# Altium PCB driver_sapog_compact.PcbDoc (part 1 of 2)
Units mil, origin at the board's own origin, x right, y up, seen from the top; angles counter-clockwise.
Board outline 2630 x 2261.5 mil, 4 copper layers (Top Layer, Mid-Layer 1, Mid-Layer 2, Bottom Layer); 113 components, 104 nets, 394 pads, 280 vias.
Unrouted connection lines stored in the file: 128.
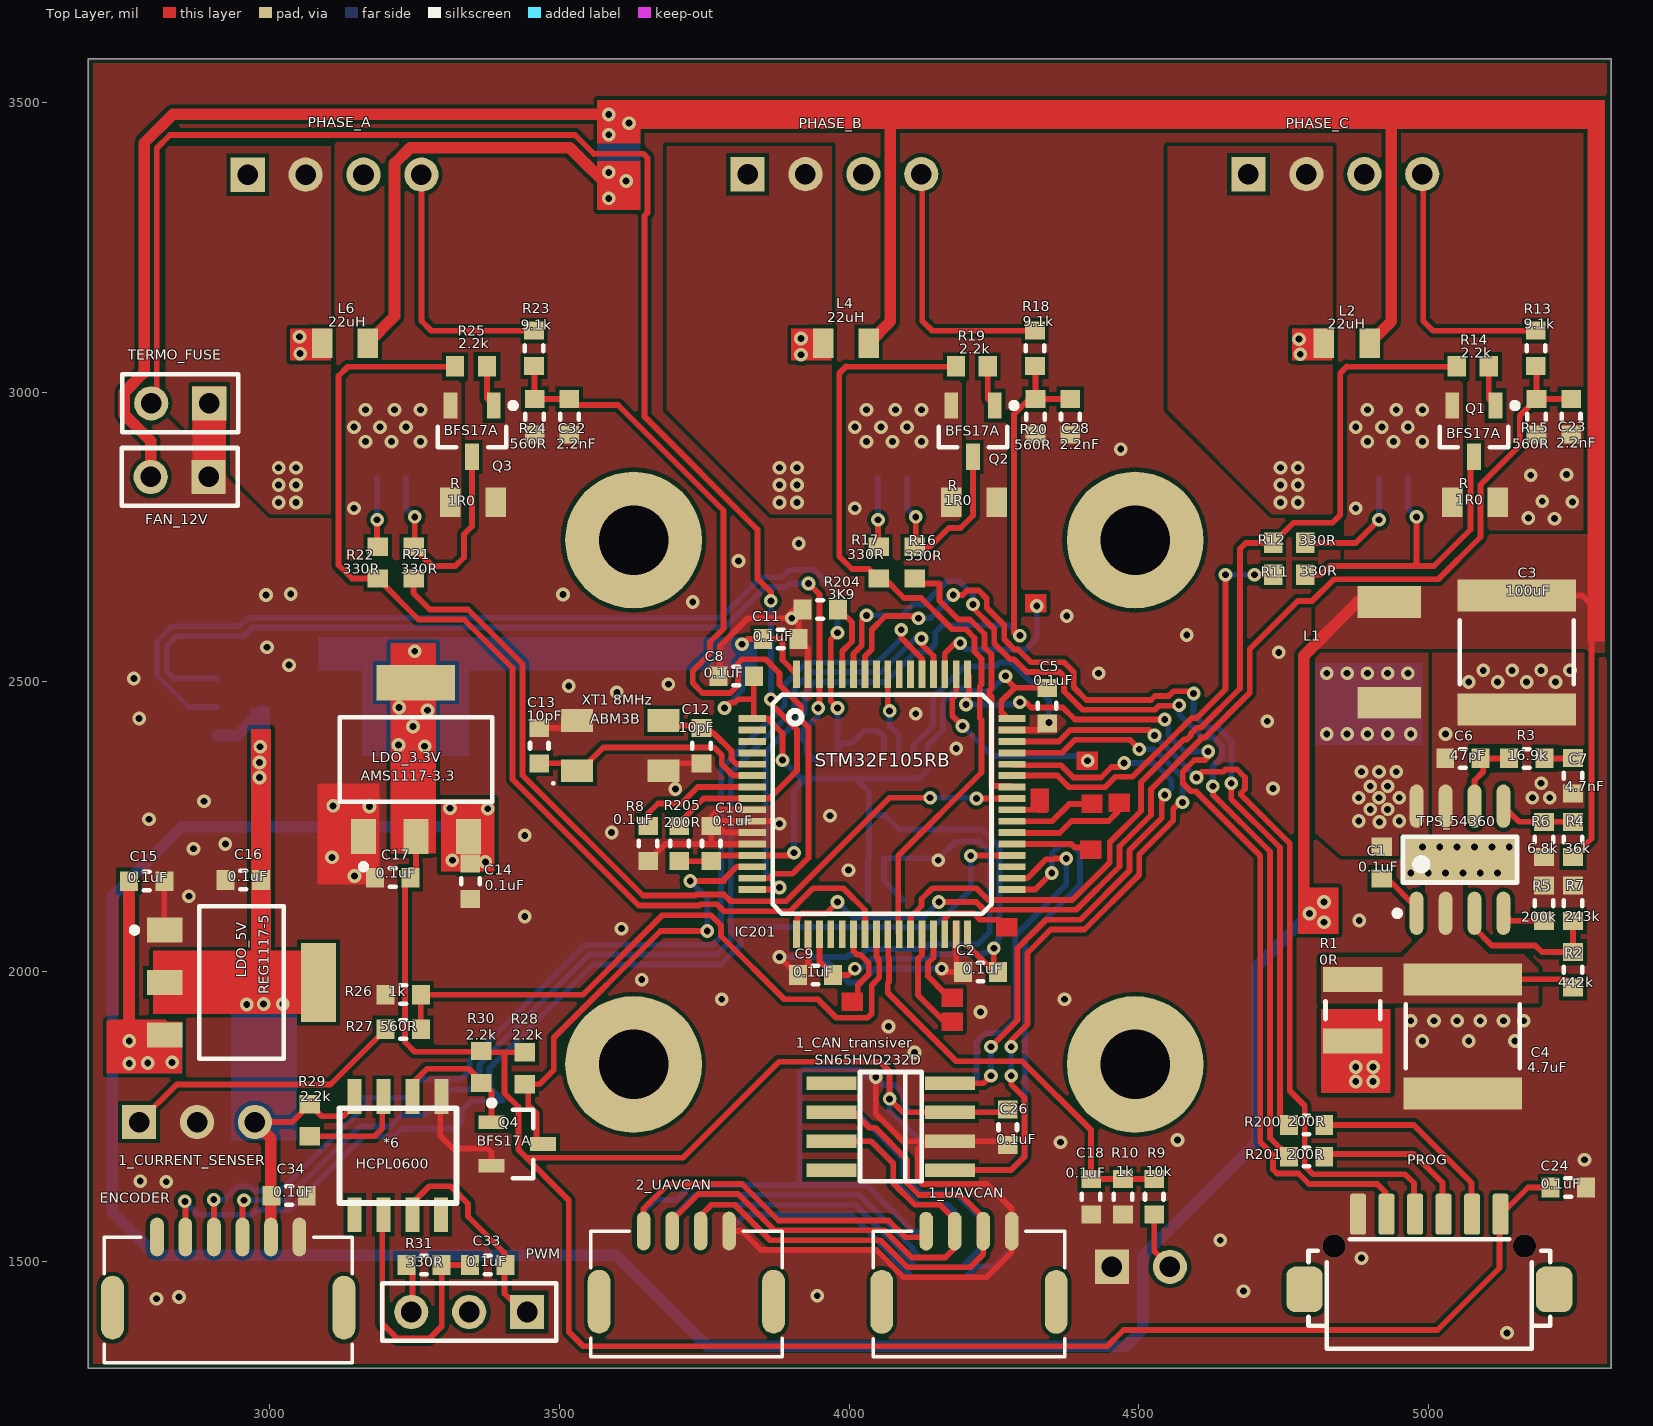
[diagram p0: Top Layer view]
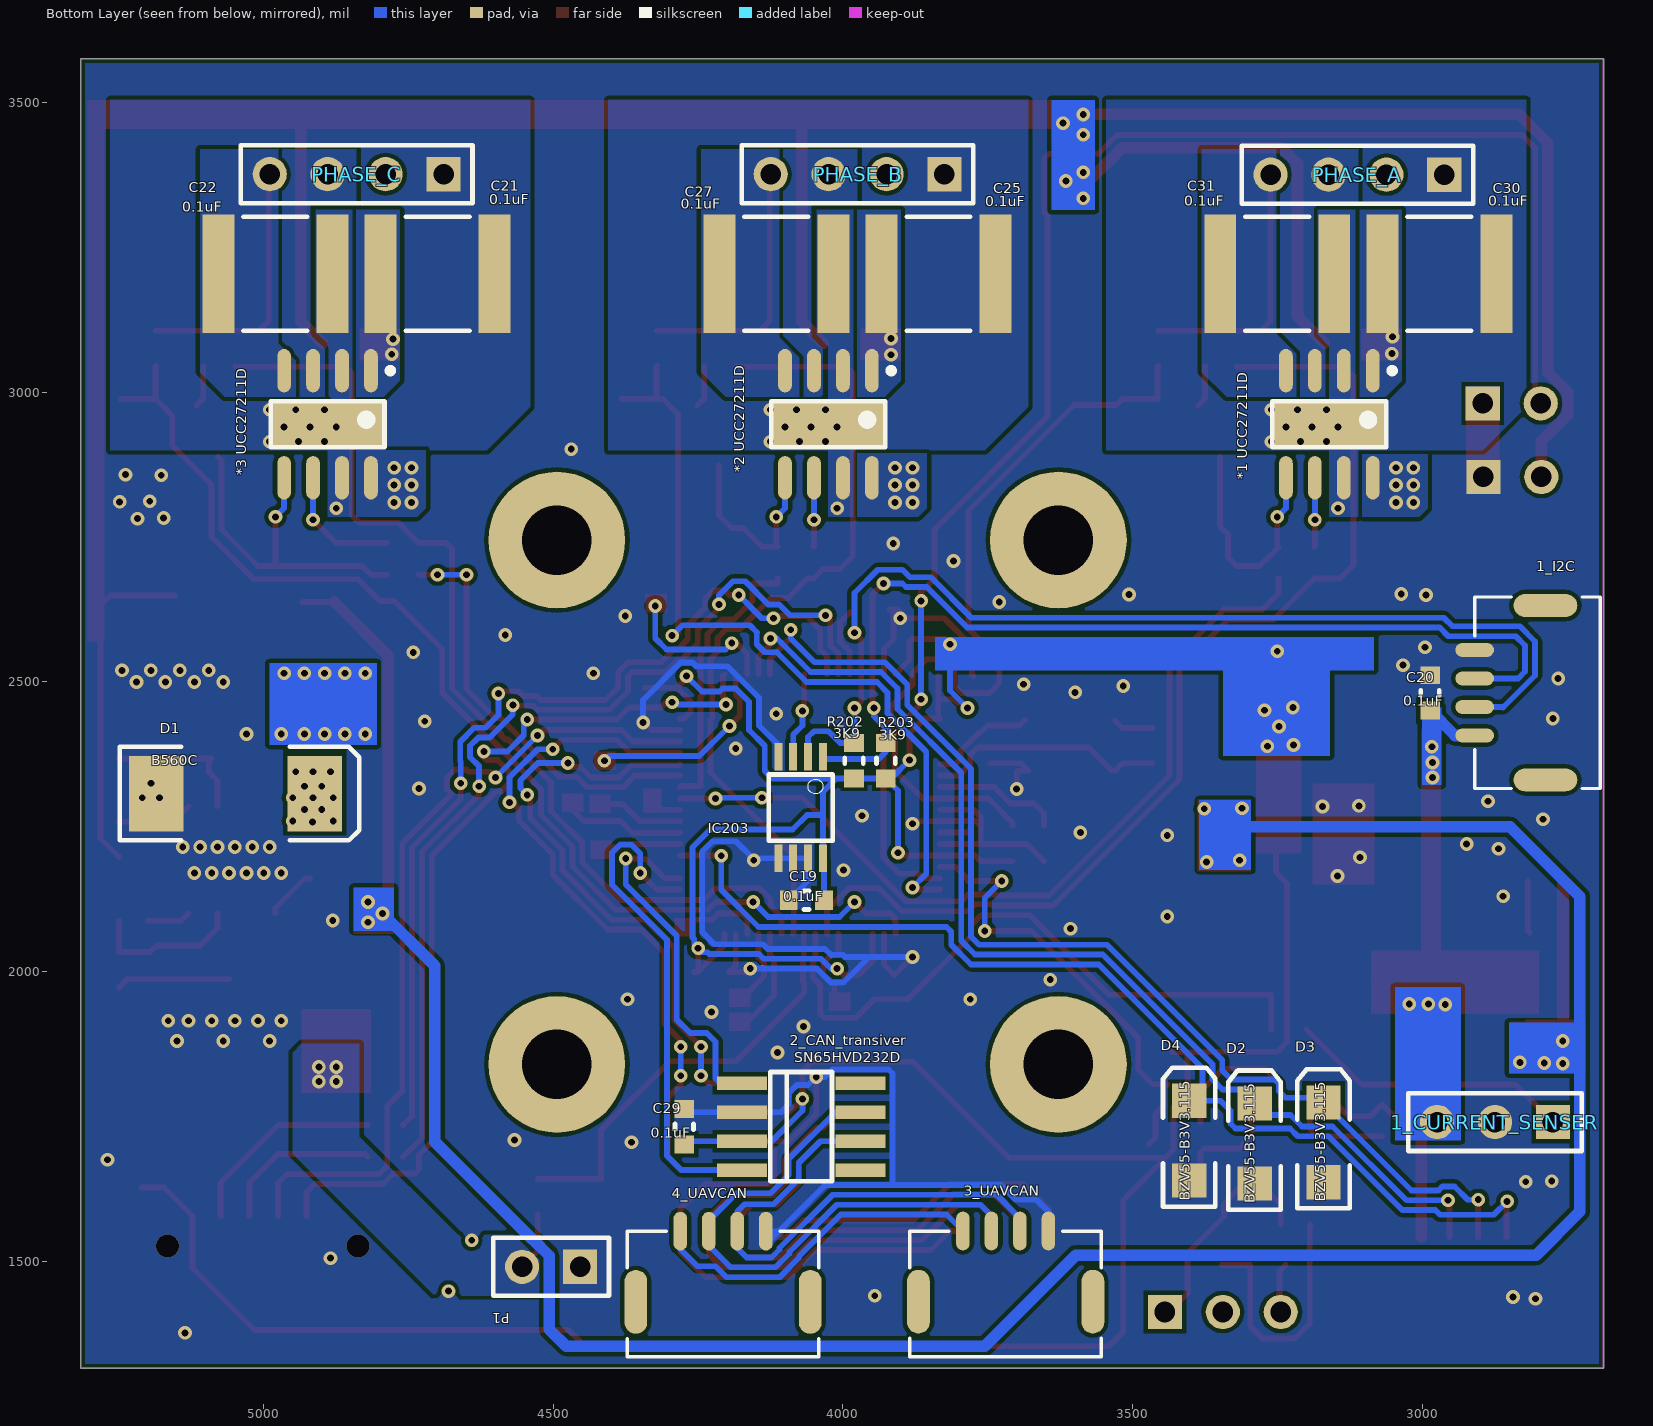
[diagram p1: Bottom Layer view, seen from below]
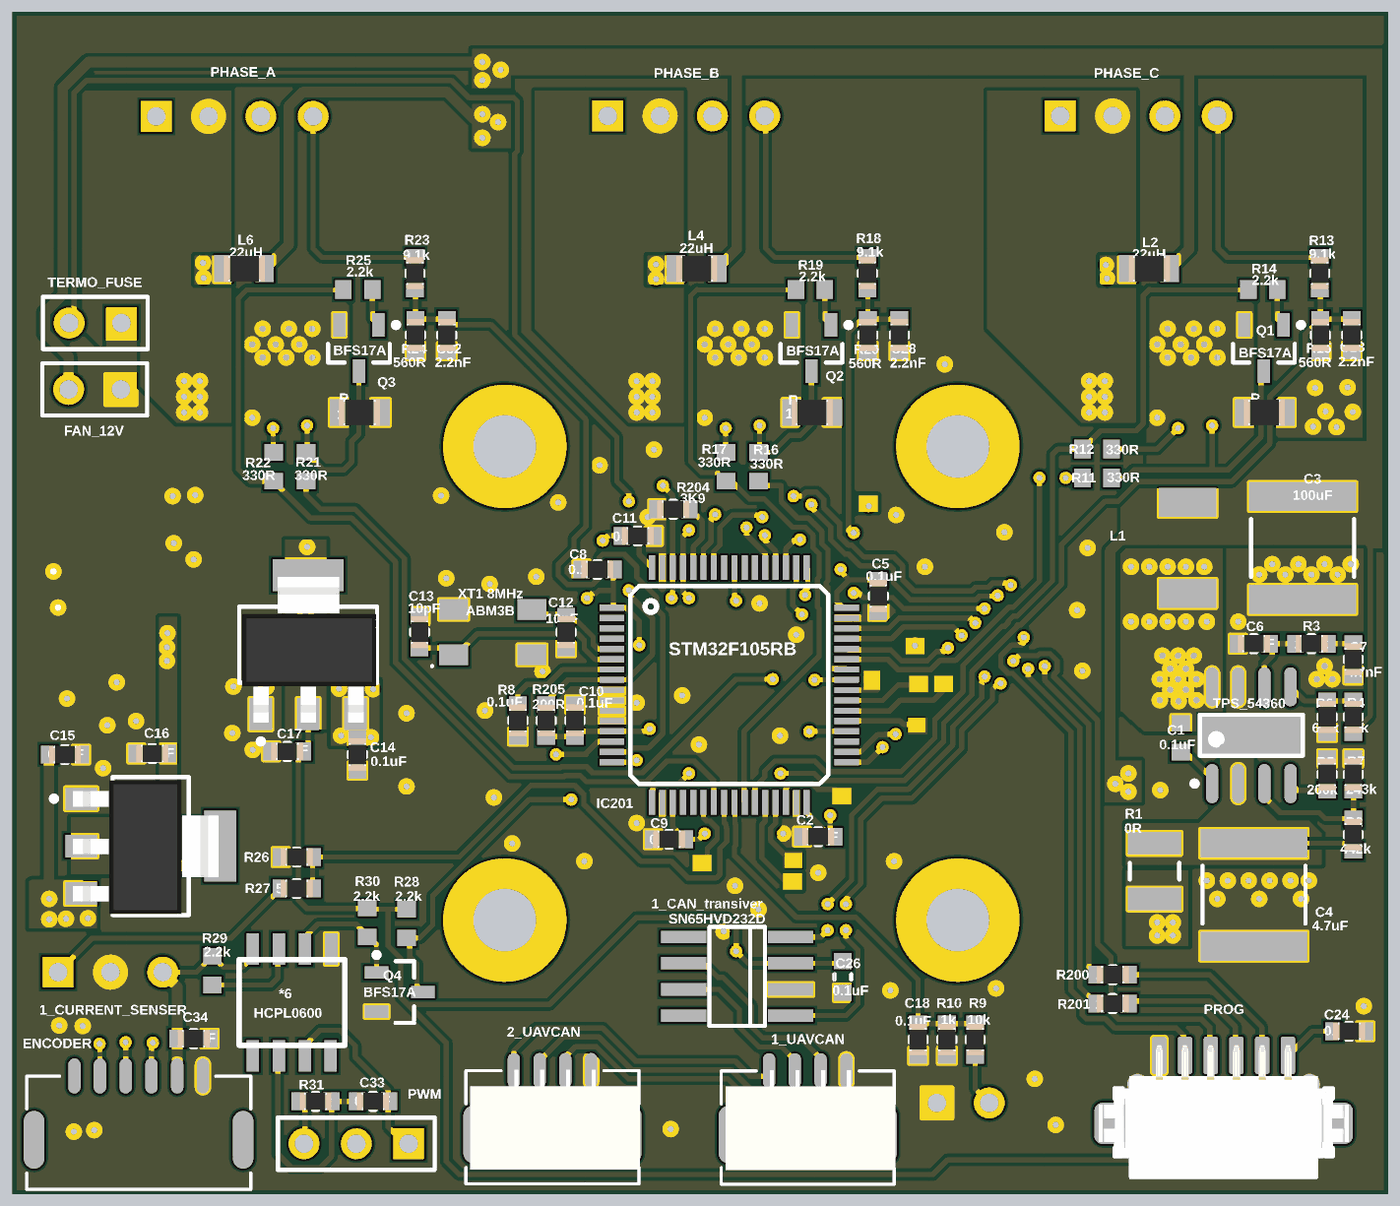
[diagram p3: 3D render of the assembled board from above, using the file's embedded part models]

## Layer stack, top to bottom
Top Solder: solder mask 0.4, Solder Resist, Dk 3.5
Top Layer: signal copper 1.4
Dielectric 1: dielectric 12.6, FR-4, Dk 4.8
Mid-Layer 1: signal copper 1.4
Dielectric3: dielectric 12.6, FR-4, Dk 4.8
Mid-Layer 2: signal copper 1.4
Dielectric2: dielectric 12.6, FR-4, Dk 4.8
Bottom Layer: signal copper 1.4
Bottom Solder: solder mask 0.4, Solder Resist, Dk 3.5

## Board outline
2686.5,1314.5 5316.5,1314.5 5316.5,3576 2686.5,3576

## Design rules (kind name [scope] priority, off if disabled: settings)
Clearance [All] p1: gap=7 ignorepadtopadclearanceinfootprint=FALSE
PlaneConnect [All] p1: planeconnectstyle=Direct reliefexpansion=20 reliefentries=4 reliefconductorwidth=10 reliefairgap=10
PolygonConnect [All] p1: connectstyle=Direct reliefconductorwidth=10 reliefentries=4 polygonreliefangle="90 Angle" airgapwidth=10
RoutingVias [All] p1: holewidth=28 width=50 viastyle="Through Hole" minholewidth=28 minwidth=50 maxholewidth=28 maxwidth=50
SolderMaskExpansion [All] p1: expansion=4
UnRoutedNet [All] p1: checkbadconnections=TRUE
Width [All] p1: maxlimit=50 minlimit=10 preferedwidth=20
28 further rules are at their usual default settings.

## Components (designator, comment, footprint, x,y, rotation, side; value= is the part's Value field where it differs from the comment)
1_CAN_transiver "SN65HVD232D" SOIC8 4072,1732 r180 top
1_CURRENT_SENSER "Header 3" HDR1X3 2774,1740 r0 bottom (schematic designator 1_CURRENT_SENCE)
1_I2C "CON-4P-RA" JST_GH-4P-RA 2794.43,2481.39 r270 bottom
1_UAVCAN "CON-4P-RA" JST_GH-4P-RA 4207,1437 r180 top
2_CAN_transiver "SN65HVD232D" SOIC8 4072,1732 r180 bottom
2_UAVCAN "CON-4P-RA" JST_GH-4P-RA 3719,1437.32 r180 top
3_UAVCAN "CON-4P-RA" JST_GH-4P-RA 3719,1437.32 r0 bottom
4_UAVCAN "CON-4P-RA" JST_GH-4P-RA 4207,1437 r0 bottom
"*1 UCC27211D" "UCC27211DDA" D8_L_G 3160,2945 r270 bottom
"*2 UCC27211D" "UCC27211DDA" D8_L_G 4025,2945 r270 bottom
"*3 UCC27211D" "UCC27211DDA" D8_L_G 4890,2945 r270 bottom
*6 "HCPL0600" UCC37322P 3120,1764 r0 top
C1 "0.1uF" 1608[0603] 4920,2188 r90 top value=100nF
C2 "0.1uF" SMT0603/VISHAY 4227,1999 r0 top value=100nF
C3 "100uF" 2220 5153,2551 r90 top value="47uF 25V"
C4 "4.7uF" 2220 5060,1888 r90 top value="4.7uF 100v"
C5 "0.1uF" SMT0603/VISHAY 4342,2459 r90 top value=100nF
C6 "47pF" SMT0603/VISHAY 5060,2368 r180 top value=100nF
C7 "4.7nF" SMT0603/VISHAY 5250,2338 r270 top value=100nF
C8 "0.1uF" SMT0603/VISHAY 3805,2510 r0 top value=100nF
C9 "0.1uF" SMT0603/VISHAY 3942,1994 r0 top value=100nF
C10 "0.1uF" SMT0603/VISHAY 3762,2221 r270 top value=100nF
C11 "0.1uF" SMT0603/VISHAY 3882,2574 r180 top value=100nF
C12 "10pF" SMT0603/VISHAY 3745,2390 r90 top value=100nF
C13 "10pF" SMT0603/VISHAY 3465,2390 r270 top value=100nF
C14 "0.1uF" SMT0603/VISHAY 3346,2156 r90 top value=100nF
C15 "0.1uF" SMT0603/VISHAY 2787,2156 r180 top value=100nF
C16 "0.1uF" SMT0603/VISHAY 2954,2158 r0 top value=100nF
C17 "0.1uF" SMT0603/VISHAY 3212,2162 r0 top value=100nF
C18 "0.1uF" SMT0603/VISHAY 4418,1611 r90 top value=100nF
C19 "0.1uF" SMT0603/VISHAY 4063,2123 r0 bottom value=100nF
C20 "0.1uF" SMT0603/VISHAY 2986,2481 r270 bottom value=100nF
C21 "0.1uF" 2220 4700,3205 r180 bottom value=100nF
C22 "0.1uF" 2220 4980,3205 r0 bottom value=100nF
C23 "2.2nF" SMT0603/VISHAY 5247,2958 r270 top value=100nF
C24 "0.1uF" SMT0603/VISHAY 5242,1627 r0 top value=100nF
C25 "0.1uF" 2220 3835,3205 r180 bottom value=100nF
C26 "0.1uF" SMT0603/VISHAY 4274,1731 r90 top value=100nF
C27 "0.1uF" 2220 4115,3205 r0 bottom value=100nF
C28 "2.2nF" SMT0603/VISHAY 4382,2958 r270 top value=100nF
C29 "0.1uF" SMT0603/VISHAY 4274,1732 r90 bottom value=100nF
C30 "0.1uF" 2220 2970,3205 r180 bottom value=100nF
C31 "0.1uF" 2220 3250,3205 r0 bottom value=100nF
C32 "2.2nF" SMT0603/VISHAY 3517,2958 r270 top value=100nF
C33 "0.1uF" SMT0603/VISHAY 3376,1493 r180 top value=100nF
C34 "0.1uF" SMT0603/VISHAY 3033,1613 r180 top value=100nF
D1 "B560C" SMC 5049,2307 r180 bottom
D2 "BZV55-B3V3.115" 3.2x1.6x1.1 3289,1703 r90 bottom
D3 "BZV55-B3V3.115" 3.2x1.6x1.1 3170,1705 r90 bottom
D4 "BZV55-B3V3.115" 3.2x1.6x1.1 3402,1708 r90 bottom
ENCODER "Header 5" jst_gh_6_pin 2932,1437 r180 top
FAN_12V "Header 2" HDR1X2 2894,2854 r180 top
IC201 "STM32F105RB" TQFP64-10X10 4057,2289 r0 top
IC203 "LM75BD-TSSOP8" TSSOP8 4073,2283 r270 bottom
L1 "SPM5020T-100M-LR" Inductor 4933,2551 r90 top
L2 "22uH" 0805 4820,3085 r0 top
L4 "22uH" 0805 3955,3085 r0 top
L6 "22uH" 0805 3090,3085 r0 top
LDO_3.3V "AMS1117-3.3" ZZ311 3252,2366 r0 top
LDO_5V "REG1117-5" ZZ311 2951,1981 r270 top
P1 "Header 2" HDR1X2 4454,1490 r0 bottom
PHASE_A "Header 4" HDR1X4 2961.5,3376 r0 bottom
PHASE_B "Header 4" HDR1X4 3824.71,3376.83 r0 bottom
PHASE_C "Header 4" HDR1X4 4689.71,3376.83 r0 bottom
PROG "CONN HEADER SH 6POS SIDE 1MM TIN" "HIROSE DF13-6P-1.25H" 5002,1447 r180 top
PWM "Header 3" HDR1X3 3444,1412 r180 top
Q1 "BFS17A" SOT-23_N 5079,2933 r270 top
Q2 "BFS17A" SOT-23_N 4214,2933 r270 top
Q3 "BFS17A" SOT-23_N 3349,2933 r270 top
Q4 "BFS17A" SOT-23_N 3427,1702 r0 top
R "1R0" 0805 5120,2810 r180 top value=22uH (schematic designator L3)
R "1R0" 0805 4255,2810 r180 top value=22uH (schematic designator L5)
R "1R0" 0805 3390,2810 r180 top value=22uH (schematic designator L7)
R1 "0R" 14-1210 4870,1933 r270 top
R2 "442k" SMT0603/VISHAY 5250,2003 r270 top
R3 "16.9k" SMT0603/VISHAY 5170,2368 r180 top
R4 "36k" SMT0603/VISHAY 5250,2228 r270 top
R5 "200k" SMT0603/VISHAY 5200,2118 r90 top
R6 "6.8k" SMT0603/VISHAY 5200,2228 r90 top
R7 "243k" SMT0603/VISHAY 5250,2118 r270 top
R8 "0.1uF" SMT0603/VISHAY 3653,2221 r90 top
R9 "10k" SMT0603/VISHAY 4527,1611 r90 top value=20k
R10 "1k" SMT0603/VISHAY 4473,1611 r270 top value=1.3k
R11 "330R" 1608[0603] 4760,2685 r180 top
R12 "330R" 1608[0603] 4760,2740 r180 top
R13 "9.1k" SMT0603/VISHAY 5186,3076 r270 top
R14 "2.2k" 1608[0603] 5077,3045 r180 top
R15 "560R" SMT0603/VISHAY 5187,2958 r90 top value=560
R16 "330R" 1608[0603] 4113,2706 r270 top
R17 "330R" 1608[0603] 4051,2706 r270 top
R18 "9.1k" SMT0603/VISHAY 4321,3076 r270 top
R19 "2.2k" 1608[0603] 4212,3045 r180 top
R20 "560R" SMT0603/VISHAY 4322,2958 r90 top value=560
R21 "330R" 1608[0603] 3248,2706 r270 top
R22 "330R" 1608[0603] 3186,2706 r270 top
R23 "9.1k" SMT0603/VISHAY 3456,3076 r270 top
R24 "560R" SMT0603/VISHAY 3457,2958 r90 top value=560
R25 "2.2k" 1608[0603] 3347,3045 r180 top
R26 "1k" SMT0603/VISHAY 3230,1960 r180 top
R27 "560R" SMT0603/VISHAY 3230,1900 r0 top value=500R
R28 "2.2k" 1608[0603] 3440,1832.81 r270 top
R29 "2.2k" 1608[0603] 3069,1743 r270 top
R30 "2.2k" 1608[0603] 3365,1835 r270 top
R31 "330R" SMT0603/VISHAY 3266,1493 r0 top
R200 "200R" SMT0603/VISHAY 4790,1735 r180 top
R201 "200R" SMT0603/VISHAY 4790,1680 r180 top
R202 "3K9" SMT0603/VISHAY 3981,2364 r90 bottom
R203 "3K9" SMT0603/VISHAY 3926,2364 r90 bottom
R204 "3K9" SMT0603/VISHAY 3950,2625 r0 top
R205 "200R" SMT0603/VISHAY 3707,2221 r270 top
TERMO_FUSE "Header 2" HDR1X2 2895,2981 r180 top
TPS_54360 "=Device" D8_L_G 5055,2193 r90 top
"XT1 8MHz" "ABM3B" DFN220P320X110-4N 3605,2390 r0 top value="8 MHz" (schematic designator XT1)

## Footprints (in the part's own frame and the unit in brackets; to place one, negate y for a bottom-side part, rotate by r counter-clockwise, add the part's x,y. Pads: shape width x height; smd on the part's side, far side on the other; paste and mask are expansions set on the pad)
3.2x1.6x1.1 [mm] "SMT LED; 2 Flat Leads"
  rect 1.5x1.5 smd: 1(-1.75,0) 2(1.75,0)
  silkscreen extent -2.9,-1.15 3.2,1.15
14-1210 [mm] "Chip Resistor, Body 3.2x2.5mm, IPC High Density"
  rect 1.1x2.6 smd: 1(-1.35,0) 2(1.35,0)
  silkscreen extent -0.4,-1.2 0.4,1.2, body extent -1.68,-1.32 1.68,1.32, height 0.9
0805 [mm]
  rect 0.9x1.3 smd: 1(0,0) 2(2,0)
  body extent 0.02,-0.63 2.02,0.63, height 0.45
1608[0603] [mm] "Chip Capacitor, Body 1.6x0.8mm, IPC High Density"
  rect 0.8x0.9 smd: 1(-0.7,0) 2(0.7,0)
  body extent -0.88,-0.48 0.87,0.48, height 1.3
2220 [mm] "Chip Capacitor, Body 5.7x5.0mm, IPC High Density"
  rect 1.4x5.2 smd: 1(-2.5,0) 2(2.5,0)
  silkscreen extent -1.4,-2.5 1.4,2.5, body extent -2.95,-2.63 2.95,2.63, height 1.4
D8_L_G [mm] "SOIC, 8-Leads, Body 4.9x3.9mm, Pitch 1.27mm, IPC High Density"
  oval 1.9x0.6 smd: 1(-2.35,1.905) 2(-2.35,0.635) 3(-2.35,-0.635) 4(-2.35,-1.905) 5(2.35,-1.905) 6(2.35,-0.635) 7(2.35,0.635) 8(2.35,1.905)
  rect 1.9x5 smd: 9(0,0)
  silkscreen extent -2.47,-2.5 1,2.88, body extent -2,-2.5 2,2.5, height 1.75
DFN220P320X110-4N [mm] "DFN, 4-Leads, Body 5.00x3.20mm, Pitch 2.20mm, IPC Medium Density"
  rect 1.4x1 smd: 1(-1.9,-1.1) 3(1.9,1.1) G(-1.9,1.1) G(1.9,-1.1)
  silkscreen extent -3,-1.7 -2.9,-1.6, body extent -2.55,-1.65 2.55,1.65, height 1.1
HDR1X2 [mm] "Connector; Header; 2 Position"
  rect 1.5x1.5 hole 0.9: 1(0,0)
  round 1.5 hole 0.9: 2(2.54,0)
  silkscreen extent -1.27,-1.27 3.81,1.27
HDR1X3 [mm] "Connector; Header; 3 Position"
  rect 1.5x1.5 hole 0.9: 1(0,0)
  round 1.5 hole 0.9: 2(2.54,0) 3(5.08,0)
  silkscreen extent -1.27,-1.27 6.35,1.27
HDR1X4 [mm] "Connector; Header; 4 Position"
  rect 1.5x1.5 hole 0.9: 1(0,0)
  round 1.5 hole 0.9: 2(2.54,0) 3(5.08,0) 4(7.62,0)
  silkscreen extent -1.27,-1.27 8.89,1.27
"HIROSE DF13-6P-1.25H" [mm] "DF13 Series 1.25mm pitch miniature crimping connector single row"
  rrect30% 0.7x1.8 smd: 1(-3.125,-3.4) 2(-1.875,-3.4) 3(-0.625,-3.4) 4(0.625,-3.4) 5(1.875,-3.4) 6(3.125,-3.4)
  rrect50% 1.6x2 smd: M(-5.475,-0.1) M(5.475,-0.1)
  silkscreen extent -5.3,-2.3 5.3,2.5, body extent -6.08,-3.9 6.07,2.6, height 3.59
Inductor [mil]
  rect 55x110 smd: 1(-87,0) 2(87,0)
  body extent -106,-100 106,101, height 78
JST_GH-4P-RA [mm]
  rrect100% 0.6x1.7 smd: 1(1.875,-2.91) 2(0.625,-2.91) 3(-0.625,-2.91) 4(-1.875,-2.91)
  rrect100% 1x2.8 smd: M$0(-3.825,0.19) M$1(3.825,0.19)
  silkscreen extent -4.2,-2.9 4.2,2.6, body extent -4.25,-2.94 4,1.91, height 4.35
jst_gh_6_pin [mil]
  rrect100% 23.62x66.93 smd: 1(127,-104.57) 2(78.1,-104.57) 3(28.81,-104.57) 4(-20.4,-104.57) 5(-69.61,-104.57) 6(-118.82,-104.57)
  rrect100% 39.37x110.24 smd: 7(204,17.48) 8(-195.59,17.48)
  silkscreen extent -210,-104 218,112, body extent -206,-105 216,85, height 171
SMC [mm] "DO-214-AB/SMC; 2 C-Bend Leads; Body 7.9 x 5.9 mm, inc. leads (LxW)"
  rect 2.4x3.3 smd: 1(-3.475,0) 2(3.475,0)
  silkscreen extent -5.07,-2.05 5.43,2.06
SMT0603/VISHAY [mm]
  rect 0.787x0.864 smd: 1(-0.775,0) 2(0.775,0)
  silkscreen extent -0.13,-0.41 0.13,0.41, body extent -0.78,-0.43 0.77,0.43, height 0.45
SOIC8 [mil]
  rect 86.61x23.62 smd: 1(-102.36,75) 2(-102.36,25) 3(-102.36,-25) 4(-102.36,-75) 5(102.36,-75) 6(102.36,-25) 7(102.36,25) 8(102.36,75)
  silkscreen extent -53,-94 53,94, body extent -79,-98 79,98, height 69
SOT-23_N [mm] "SOT23, 3-Leads, Body 2.9x1.3mm, Pitch 0.95mm, Lead Span 2.5mm, IPC Medium Density"
  rect 1.15x0.6 smd: 1(-1.125,0.95) 2(-1.125,-0.95) 3(1.125,0)
  silkscreen extent -1.25,-1.5 0.7,1.93, body extent -0.7,-1.5 0.7,1.5, height 1.1
TQFP64-10X10 [mm]
  rect 1.2x0.3 smd: 1(-5.7,3.75) 2(-5.7,3.25) 3(-5.7,2.75) 4(-5.7,2.25) 5(-5.7,1.75) 6(-5.7,1.25) 7(-5.7,0.75) 8(-5.7,0.25) 9(-5.7,-0.25) 10(-5.7,-0.75) 11(-5.7,-1.25) 12(-5.7,-1.75) 13(-5.7,-2.25) 14(-5.7,-2.75) 15(-5.7,-3.25) 16(-5.7,-3.75) 33(5.7,-3.75) 34(5.7,-3.25) 35(5.7,-2.75) 36(5.7,-2.25) 37(5.7,-1.75) 38(5.7,-1.25) 39(5.7,-0.75) 40(5.7,-0.25) 41(5.7,0.25) 42(5.7,0.75) 43(5.7,1.25) 44(5.7,1.75) 45(5.7,2.25) 46(5.7,2.75) 47(5.7,3.25) 48(5.7,3.75)
  rect 0.3x1.2 smd: 17(-3.75,-5.7) 18(-3.25,-5.7) 19(-2.75,-5.7) 20(-2.25,-5.7) 21(-1.75,-5.7) 22(-1.25,-5.7) 23(-0.75,-5.7) 24(-0.25,-5.7) 25(0.25,-5.7) 26(0.75,-5.7) 27(1.25,-5.7) 28(1.75,-5.7) 29(2.25,-5.7) 30(2.75,-5.7) 31(3.25,-5.7) 32(3.75,-5.7) 49(3.75,5.7) 50(3.25,5.7) 51(2.75,5.7) 52(2.25,5.7) 53(1.75,5.7) 54(1.25,5.7) 55(0.75,5.7) 56(0.25,5.7) 57(-0.25,5.7) 58(-0.75,5.7) 59(-1.25,5.7) 60(-1.75,5.7) 61(-2.25,5.7) 62(-2.75,5.7) 63(-3.25,5.7) 64(-3.75,5.7)
  silkscreen extent -4.8,-4.8 4.8,4.8, body extent -5,-5 5,5, height 1.6
TSSOP8 [mm]
  rect 1.2x0.35 smd: 1(-2.225,0.975) 2(-2.225,0.325) 3(-2.225,-0.325) 4(-2.225,-0.975) 5(2.225,-0.975) 6(2.225,-0.325) 7(2.225,0.325) 8(2.225,0.975)
  silkscreen extent -1.45,-1.4 1.45,1.4, body extent -2.47,-1.55 2.43,1.55, height 1.1
UCC37322P [mil]
  rect 24x60 smd: 1(26,-184) 2(76,-184) 3(126,-184) 4(175,-184) 5(176,20) 6(126,20) 7(76,20) 8(26,20)
  silkscreen extent 0,-164 202,0, body extent 0,-164 202,0, height 143
ZZ311 [mm] "SOT-223/SC-73; 4 Leads; Body 6.7 x 7.3 mm, inc. leads (LxW max)"
  rect 1.1x1.55 smd: 1(-2.3,-3.375) 2(0,-3.375) 3(2.3,-3.375)
  rect 3.45x1.55 smd: 4(0,3.375)
  silkscreen extent -3.35,-4.82 3.35,1.85, body extent -3.2,-3.79 3.3,3.28, height 1.6

## Part data
1_CAN_transiver 2_CAN_transiver: "IC CAN TRANSCEIVER 3.3V 8-SOIC", DIGIKEY#=296-26344-1-ND, MANF="Texas Instruments", MANF#=SN65HVD232DR, SN65HVD232=SN65HVD232
1_CURRENT_SENSER PWM: "Header, 3-Pin", LatestRevisionDate=17-Jul-2002, LatestRevisionNote="Re-released for DXP Platform.", Publisher="Altium Limited"
1_I2C 1_UAVCAN 2_UAVCAN 3_UAVCAN 4_UAVCAN: "Connector Receptacle 4 Position 0.049\" (1.25mm) Tin Surface Mount, Right Angle", DIGIKEY#=WM4948CT-ND, MANF=Molex, MANF#=5023860470
*6: library part Component_1
C1 C2 C5 C6 C7 C8 C9 C10 C11 C12 C13 C14 C15 C16 C17 C18 C19 C20 C21 C22 C23 C24 C25 C26 C27 C28 C29 C30 C31 C32 C33 C34: library part "Cap Semi", "Capacitor (Semiconductor SIM Model)", LatestRevisionDate=29-May-2009, LatestRevisionNote="IPC-7351 Footprint Added.", PackageDescription="Chip Capacitor", PackageReference=C1206, Published=8-Jun-2000, Publisher="Altium Limited"
C3: library part "Cap Semi", LatestRevisionDate=29-May-2009, LatestRevisionNote="IPC-7351 Footprint Added.", PackageDescription="Chip Capacitor", PackageReference=C1206, Published=8-Jun-2000, Publisher="Altium Limited"
C4: library part "Cap Semi", "4.7uF 100v", LatestRevisionDate=29-May-2009, LatestRevisionNote="IPC-7351 Footprint Added.", PackageDescription="Chip Capacitor", PackageReference=C2220, Published=8-Jun-2000, Publisher="Altium Limited"
D1: "60V 0.5A Shottcky Diode"
D2 D3 D4: library part BZV55-B13, "Zener Diode", Case=SOD-80C, Manufacturer="NXP SEMICONDUCTORS", Power=500mW, VOLTAGE=13V, Author="CERN DEM JLC", ComponentHeight=1.6mm, Component Type=Standard, CreateDate=06/05/2008, Device=BZV55-B13, HelpURL=\\cern.ch\dfs\Applications\Altium\Datasheets\BZV55.pdf, LatestRevisionDate=06/05/2008, Manufacturer Part Number=BZV55-B13, Mounted=Yes, PackageDescription="SOD80C, MELF Diode, 2-Leads, Body 3.5x1.5mm, IPC Medium Density", Part Description="Voltage Regulator Diode", Part Number=BZV55-B13, Pin Count=2, SMD=Yes, Socket=No, Table=Diodes
ENCODER: "Header, 5-Pin", LatestRevisionDate=17-Jul-2002, LatestRevisionNote="Re-released for DXP Platform.", Publisher="Altium Limited"
FAN_12V P1 TERMO_FUSE: "Header, 2-Pin", LatestRevisionDate=17-Jul-2002, LatestRevisionNote="Re-released for DXP Platform.", Publisher="Altium Limited"
IC201: library part STM32F105, "MCU ARM 256KB FLASH MEM 64-LQFP", OPERATING_TEMP="-40°C ~ 105°C (TA)", DIGIKEY#=497-8918-ND, MANF=STMicroelectronics, MANF#=STM32F105RCT6, STM32F105=STM32F105
IC203: "SENSOR TEMPERATURE I2C 8TSSOP", DIGIKEY#=568-4768-1-ND, LM75=LM75, MANF="NXP Semiconductors", MANF#=LM75BDP,118
L1: library part L-EPCOS_B82464
L2 L4 L6 R R R: library part Inductor, "0805", Code_IEC=1005, Code_JEITA=0402, LatestRevisionDate=29-May-2009, LatestRevisionNote="IPC-7351 Footprint Added.", PackageDescription="Chip Inductor", PackageReference=0402-A, Published=8-Jun-2000, Publisher="Altium Limited"
LDO_3.3V: library part REG1117-5, "800mA and 1A Low Dropout Positive Regulator 2.85V, 3.3V, 5V, and Adjustable", ComponentLink1Description="Manufacturer Link", ComponentLink1URL=http://www.ti.com/, ComponentLink2Description=Datasheet, ComponentLink2URL=http://www-s.ti.com/sc/ds/REG1117.pdf, DatasheetVersion=Sep-1997, LatestRevisionDate=17-Jul-2002, LatestRevisionNote="Re-released for DXP Platform.", PackageDescription="SOT-223/SC-73; 4 Leads; Body 6.7 x 7.3 mm, inc. leads (LxW max)", PackageReference=ZZ311, PackageVersion=revC, Published=8-Jun-2000, Publisher="Altium Limited"
LDO_5V: "800mA and 1A Low Dropout Positive Regulator 2.85V, 3.3V, 5V, and Adjustable", ComponentLink1Description="Manufacturer Link", ComponentLink1URL=http://www.ti.com/, ComponentLink2Description=Datasheet, ComponentLink2URL=http://www-s.ti.com/sc/ds/REG1117.pdf, DatasheetVersion=Sep-1997, LatestRevisionDate=17-Jul-2002, LatestRevisionNote="Re-released for DXP Platform.", PackageDescription="SOT-223/SC-73; 4 Leads; Body 6.7 x 7.3 mm, inc. leads (LxW max)", PackageReference=ZZ311, PackageVersion=revC, Published=8-Jun-2000, Publisher="Altium Limited"
PHASE_A PHASE_B PHASE_C: "Header, 4-Pin", LatestRevisionDate=17-Jul-2002, LatestRevisionNote="Re-released for DXP Platform.", Publisher="Altium Limited"
PROG: library part DF13_6P_1, DIGIKEY#=455-1806-1-ND, MANF="JST Sales America Inc", MANF#=SM06B-SRSS-TB(LF)(SN)
Q1 Q2 Q3 Q4: library part 2N3904, "NPN General Purpose Amplifier", ComponentLink1Description="Manufacturer Link", ComponentLink1URL=http://www.fairchildsemi.com/, ComponentLink2Description=Datasheet, ComponentLink2URL=http://www.fairchildsemi.com/ds/2N%2F2N3904.pdf, DatasheetVersion=1997, LatestRevisionDate=15-Jan-2003, LatestRevisionNote="PCB Footprint 'BCY-W3/D4.7' replaced", PackageDescription="TO, Flat Index; 3 In-Line, Axial Leads; Body Dia. 4.5mm; Leads 0.51 x 0.48 mm (max)", PackageReference=TO-92A, PackageVersion=Sep-1998, Published=8-Jun-2000, Publisher="Altium Limited"
R1: library part Res3, "fuse", LatestRevisionDate=29-May-2009, LatestRevisionNote="IPC-7351 Footprint Added.", PackageDescription="Chip Resistor", PackageReference=J1-0603, Published=8-Jun-2000, Publisher="Altium Limited"
R2 R3 R4 R5 R6 R7 R11 R12 R14 R16 R17 R19 R21 R22 R25 R28 R29 R30: library part R0402
R8 R9 R10 R13 R15 R18 R20 R23 R24 R26 R27 R31: library part Res3, "Resistor", LatestRevisionDate=29-May-2009, LatestRevisionNote="IPC-7351 Footprint Added.", PackageDescription="Chip Resistor", PackageReference=J1-0603, Published=8-Jun-2000, Publisher="Altium Limited"
R200 R201: library part 200R-0402, PACKAGE=0402, PARTNO=RC0402FR-07240RL, TOLERANCE=1%, DIGIKEY#=311-200LRCT-ND, MANF=Yageo, MANF#=RC0402FR-07200RL
R202 R203 R204: library part 3K9-0402, PACKAGE=0402, TOLERANCE=1%, DIGIKEY#=311-3.90KLRCT-ND, MANF=Yageo, MANF#=RC0402FR-073K9L
R205: library part 200R-0402, PACKAGE=0402, TOLERANCE=1%, ASSEMBLY=DNM, DIGIKEY#=311-200LRCT-ND, MANF=Yageo, MANF#=RC0402FR-07200RL
TPS_54360: library part TPS54560, "150mA Low-Noise Low-Dropout Regulator Whit Shutdown"
"XT1 8MHz": library part ABM3B-8.000MHZ-10-1-U-T, "FA-238 16.0000MB-C3", Frequency Stability=±10ppm, Load Capacitance=10pF, Manufacturer="Abracon LLC", Operating Mode=Fundamental, Operating Temperature="-10°C ~ 60°C", Package / Case="4-SMD, No Lead", Ratings=-, Supplier Part Number 1=535-9721-1-ND, Category="Crystals, Oscillators, Resonators", ComponentLink1Description=http://www.abracon.com/Resonators/abm3b.pdf, ComponentLink1URL=http://www.abracon.com/Resonators/abm3b.pdf, Frequency Tolerance=±10ppm, Height - Seated (Max)="0.043\" (1.10mm)", Manufacturer Part Number=ABM3B-8.000MHZ-10-1-U-T, Mounting Type="Surface Mount", Packaging="Cut Tape (CT)", Part Status=Active, Pricing 1="1=0.69, 10=0.578, 50=0.5198, 100=0.462, 500=0.4389 (USD)", Pricing 2="1000=0.336, 3000=0.315, 5000=0.3045, 10000=0.294 (USD)", RoHS="RoHS Compliant", Size / Dimension="0.197\" L x 0.126\" W (5.00mm x 3.20mm)", Stock=35437, Supplier 1=Digi-Key, Supplier 2=Digi-Key, Supplier Part Number 2=535-9721-2-ND, Type="MHz Crystal"

## Free pads (board coordinates)
  round 236 hole 120: 10(3627.79,1839.52) 11(3627.79,2745.03) 12(4493.93,2745.03) 13(4493.93,1839.52)

## Via types
v1: diameter 23.62/0/23.62/23.62 (per signal layer), hole 11.81, Top Layer to Bottom Layer, 278 vias
v2: diameter 39.37, hole 39.37, Top Layer to Bottom Layer, tented both sides, 2 vias

## Nets (pads, with @x,y where several pads share a name; then routed paths per layer and width w, separated by ;. In a path a pad name is that pad's centre, name@x,y a point inside that pad or via, vN(x,y) a via of type N, cw(c..) or ccw(c..) an arc to the next point about the centre after c; other vN are vias at no path point)
12V: C3.2 C14.2 C15.2 FAN_12V.2 L1.2 L2.2 L4.2 L6.2 LDO_3.3V.3 LDO_5V.3 R4.2 | length 9152.3
  Top Layer w10: 2724.13,1911.87 2818.13,1911.87 LDO_5V.3@2818.13,1890.45 ; 4790,2120 4790,2550 4878,2638 L1.2@4933,2638 ; C3.2@5153,2649.43 5265.57,2649.43 5282.01,2632.99 5282.01,2229.5 R4.2@5250,2197.49
  Top Layer w20: 2745,1889 2756.49,1900.49 C15.2@2756.49,2156 ; FAN_12V.2@2794,2854 2794,2916.2 2748.47,2961.73 2748.47,3000.27 2782.53,3034.33 2782.53,3430.64 2831.89,3480 v1(3585,3480) ; L6.2@3168.74,3085 3214.98,3131.24 3214.98,3395.27 3242.23,3422.53 3517.47,3422.53 3597.5,3342.5 ; L4.2@4033.74,3085 4071.24,3122.5 4071.24,3476.24 4075,3480 ; v1(4820,2085) 4785,2120 4785,2545 L1.2@4878,2638 ; L2.2@4898.74,3085 4936.24,3122.5 4936.24,3478.76 4930,3485
  Bottom Layer w20: 3346,2231 3327,2250 2848,2250 2727.47,2129.47 2727.47,1585.53 2803,1510 3598,1510 3755,1353 4478,1353 4507.47,1382.47 4507.47,1509.45 4534.73,1536.7 4535.7,1536.7 4705,1706 4705,2010 v1(4795,2100)
  other v1: 2757,1841 2789,1842 2831,1843 2757,1880 4820,2120 3372,2189 3315,2192 3376,2281 3311,2282 3585,3335 3615,3365 3585,3380 3585,3445 3620,3465
BOOT0: IC201.60 R204.2 | length 120.6
  Top Layer w10: R204.2@3988,2620 4005,2603 4005,2570 3988.1,2553.1 IC201.60@3988.1,2513.41
CAN1_RX: 1_CAN_transiver.4 IC201.44 | length 1055.5
  Top Layer w10: 1_CAN_transiver.4@4174.36,1807 4232,1807 v1(4245,1820) ; v1(4245,1870) 4291,1916 4291,2040 4340.45,2089.45 4399.41,2089.45 4484,2174.04 4484,2208.95 4540,2264.95 v1@4540,2305 ; IC201.44@4281.41,2357.9 4283.19,2356.11 4365.89,2356.11 4387,2335 4434.99,2335 4453.18,2353.19 4468.19,2353.19 v1(4475,2360)
  Bottom Layer w10: v1(4245,1820) v1(4245,1870) ; v1(4475,2360) 4526.92,2360 4557,2329.92 4557,2317 v1(4545,2305)
CAN1_TX: 1_CAN_transiver.1 IC201.45 | length 1305
  Top Layer w10: 1_CAN_transiver.1@4174.36,1657 4279.98,1657 4303.01,1680.03 4303.01,1781.99 4280,1805 v1(4280,1820) ; v1(4280,1870) 4280,1880.96 4308,1908.96 4308,2032 4348.45,2072.45 4406.45,2072.45 4501,2167 4501,2201.9 4559.86,2260.77 4559.86,2281.19 4575.62,2296.95 v1(4575.62,2292.03) ; IC201.45@4281.41,2377.58 4367.58,2377.58 4390,2400 4485,2400 v1(4501.19,2383.81) v1@4505,2380
  Bottom Layer w10: v1(4280,1820) v1(4280,1870) ; v1(4501.19,2383.81) 4527.15,2383.81 4575.62,2335.34 v1(4575.62,2292.03)
CAN2_RX: 2_CAN_transiver.4 IC201.33 | length 877.1
  Top Layer w10: IC201.33@4281.41,2141.36 4321.36,2141.36 v1(4350,2170)
  Bottom Layer w10: 2_CAN_transiver.4@4174.36,1657 4278.98,1657 4303.81,1681.83 4303.81,2054.77 4398.81,2149.77 4398.81,2204.86 4384.86,2218.81 4365.14,2218.81 4350,2203.67 v1(4350,2170)
CAN2_TX: 2_CAN_transiver.1 IC201.34 | length 618.1
  Top Layer w10: IC201.34@4281.41,2161.05 4308.23,2161.05 4317.03,2169.85 4317.03,2170.7 4340.14,2193.81 4353.81,2193.81 4355,2195 v1(4375,2195)
  Bottom Layer w10: 2_CAN_transiver.1@4174.36,1807 4212,1807 4220,1815 4220,1878.67 4235.14,1893.81 4263.81,1893.81 4286.81,1916.81 4286.81,2061.81 4375,2150 v1(4375,2195)
Current_sense: IC201.24 R26.1 R27.2 | length 1127.5
  Top Layer w10: R27.2@3260.51,1900 R26.1@3260.51,1960 3540.38,1960 3677.38,2097 3761.67,2097 3778.81,2079.86 3778.81,2061.19 3888,1952 3946,1952 3978,1920 4032,1920 4039,1927 4039,1976.28 4052.14,1989.42 4052.14,2015.37 4050.81,2016.7 4050.81,2021.9 4047.16,2025.56 IC201.24@4047.16,2064.59
FET_A_H: IC201.41 R21.2 | length 1473.9
  Top Layer w10: R21.2@3248,2678.44 3248,2653 3276,2625 3341.97,2625 3435.99,2530.98 3435.99,2339.03 3644.02,2131 3734.24,2131 3736.24,2133 3783.89,2133 3795.71,2121.19 3891.07,2121.19 4069.88,2300 v1(4140,2300) ; v1@4213.84,2298.84 v1(4220,2298.84) IC201.41@4281.41,2298.84
  Bottom Layer w10: v1(4140,2300) 4218.84,2300 v1(4220,2298.84)
FET_A_L: IC201.23 R22.2 R25.2 | length 1879.5
  Top Layer w10: R25.2@3319.44,3045 3319.44,3044.41 3134.41,3044.41 3118.19,3028.19 3118.19,2701.81 3141.56,2678.44 R22.2@3186,2678.44 3256.44,2608 3334.93,2608 3418.99,2523.94 3418.99,2331.98 3636.98,2114 3741.28,2114 3743.28,2116 3772.04,2116 3783.85,2104.19 3898.11,2104.19 3937.73,2143.81 3989.86,2143.81 4027.47,2106.2 IC201.23@4027.47,2064.59
FET_B_H: IC201.42 R16.2 | length 489.1
  Top Layer w10: R16.2@4113,2678.44 4113,2670 4155.67,2670 4156.19,2669.48 4156.19,2640.14 4188.52,2607.81 4208.9,2607.81 4233.81,2582.9 4233.81,2559.43 4245.79,2547.45 4245.79,2488.51 4242.56,2485.27 4242.56,2478.16 4245.79,2474.93 4245.79,2320.3 4279.64,2320.3 IC201.42@4281.41,2318.53
FET_B_L: IC201.26 R17.2 R19.2 | length 1394.7
  Top Layer w10: IC201.26@4086.53,2064.59 4085,2066.12 4085,2200 4228.79,2343.79 4228.79,2434.45 4225.56,2437.68 4225.56,2450.88 4225.81,2451.14 4225.81,2470.86 4225.56,2471.12 4225.56,2492.32 4228.79,2495.55 4228.79,2540.21 4216.81,2552.19 4216.81,2575.86 4201.86,2590.81 4178.19,2590.81 4124,2645 4095,2645 4061.56,2678.44 R17.2@4051,2678.44 4034.44,2695 4005,2695 3983.19,2716.81 3983.19,3033.19 3995,3045 3995.59,3044.41 4184.44,3044.41 R19.2@4184.44,3045
FET_C_H: IC201.43 R11.2 | length 727.1
  Top Layer w10: IC201.43@4281.41,2338.21 4359.75,2338.21 4379.96,2318 4442.03,2318 4460.22,2336.19 4489.62,2336.19 4571.27,2417.84 4571.9,2417.84 4591.88,2437.81 4600.31,2437.81 4650,2487.5 v1(4650,2685) ; v1(4700,2685) R11.2@4732.44,2685
  Bottom Layer w10: v1(4650,2685) v1(4700,2685)
FET_C_L: IC201.27 R12.2 R14.2 | length 1727.5
  Top Layer w10: IC201.27@4106.21,2064.59 4106.21,2094.21 4125,2113 4125,2125 4143.81,2143.81 4220,2143.81 4240.35,2123.45 4385.33,2123.45 4450,2188.12 4450,2223.03 4504.19,2277.22 4504.19,2326.72 4578.31,2400.84 4583.12,2400.84 4590.36,2408.07 4590.36,2410.85 4600.31,2420.81 4607.36,2420.81 4675,2488.45 4675,2730 4685,2740 R12.2@4732.44,2740 4767.44,2775 4835,2775 4848.19,2788.19 4848.19,3033.19 4860,3045 4860.59,3044.41 5049.44,3044.41 R14.2@5049.44,3045
GND: 1_CAN_transiver.2 1_CURRENT_SENSER.2 1_I2C.4 1_UAVCAN.4 2_CAN_transiver.2 2_UAVCAN.4 3_UAVCAN.4 4_UAVCAN.4 "XT1 8MHz.G" *6.5 C2.1 C3.1 C4.1 C5.1 C6.2 C7.2 C8.1 C9.1 C10.1 C11.1 C12.1 C13.1 C14.1 C15.1 C16.1 C17.1 C18.1 C19.2 C20.1 C23.2 C24.2 C26.1 C28.2 C29.2 C32.2 C34.1 D1.1 D2.1 D3.1 D4.1 ENCODER.6 FAN_12V.1 IC201.9 IC201.10 IC201.11 IC201.12 IC201.18 IC201.31 IC201.47 IC201.63 IC203.4 IC203.5 IC203.6 IC203.7 LDO_3.3V.1 LDO_5V.1 P1.1 PROG.6 Q4.2 R5.2 R6.1 R7.1 R8.1 R10.2 R15.1 R20.1 R24.1 R26.2 R204.1 R.1 TERMO_FUSE.1 TPS_54360.7 TPS_54360.9 | length 5655.5
  Top Layer w10: LDO_5V.1@2814.09,2067.51 LDO_5V.1@2818.13,2071.55 2817.51,2072.17 C15.1@2817.51,2156 ; 3086.36,2233.13 LDO_3.3V.1@3161.45,2233.13 3181.49,2213.09 C17.1@3181.49,2162 ; *6.5@3294,1767 3294,1716.4 3316,1694.4 3375.6,1694.4 3382.71,1687.29 Q4.2@3382.71,1664.6 ; C13.1@3465,2420.51 3517.4,2420.51 3530.2,2433.31 ; R8.1@3653,2190.49 3682.51,2220 3760,2220 ; v1(3700,2315) 3700,2345 3698.31,2346.69 3679.8,2346.69 3692.6,2359.49 C12.1@3745,2359.49 ; C8.1@3774.49,2510 3777,2512.51 3777,2562 3825,2610 3890,2610 3905,2625 R204.1@3919.49,2625 3912.51,2618.02 C11.1@3912.51,2574 3929.05,2557.46 IC201.63@3929.05,2513.41 ; 3780,2245 3785.21,2239.79 IC201.11@3832.59,2239.79 ; 2_UAVCAN.4@3792.82,1551.88 3815.11,1551.88 3848,1519 4047.17,1519 4094.07,1472.11 4237.1,1472.11 4280.82,1515.82 1_UAVCAN.4@4280.82,1551.57 4280.82,1590.18 4237.81,1633.19 4126.08,1633.19 4119.33,1639.94 4119.06,1639.94 4119.06,1694.06 1_CAN_transiver.2@4132,1707 ; IC201.12@3832.59,2220.1 3832.49,2220 3760,2220 ; IC201.9@3832.59,2279.16 3774.16,2279.16 3762,2267 C10.1@3762,2251.51 ; v1(3880,2025) 3911,1994 C9.1@3911.49,1994 3929.05,2011.56 IC201.18@3929.05,2064.59 ; v1(3880,2255) 3875.53,2259.47 IC201.10@3832.59,2259.47 3832.06,2260 3770.49,2260 C10.1@3762,2251.51 ; v1(4046.19,1817.81) 4046.19,1753.81 4093,1707 1_CAN_transiver.2@4132,1707 ; v1(4160,2005) 4166,1999 C2.1@4196.49,1999 4184.95,2010.54 IC201.31@4184.95,2064.59 ; C26.1@4274,1700.49 4267.49,1707 1_CAN_transiver.2@4174.36,1707 1_CAN_transiver.2@4132,1707 ; IC201.47@4281.41,2416.95 4330.46,2416.95 C5.1@4342,2428.49 ; 3760,2220 3762,2222 C10.1@3762,2251.51
  Bottom Layer w10: 3_UAVCAN.4@3645.18,1551.88 3645.18,1585.18 3666,1606 3701.96,1606 3727.31,1631.35 4030.65,1631.35 4110.43,1551.57 4_UAVCAN.4@4133.18,1551.57 4121.58,1539.97 4055.55,1606 ; v1(3880,2025) 3955,2025 ; 3914.34,1634 3914.34,1690.22 3914.33,1823.78 3921.36,1830.81 4017.92,1830.81 4030.92,1817.81 v1(4046.19,1817.81) 4060.19,1803.81 4079.86,1803.81 4093.81,1789.86 4093.81,1770.19 4107,1757 2_CAN_transiver.2@4174.36,1757 4268.49,1757 C29.2@4274,1762.51 ; C19.2@4093.51,2123 4060.2,2156.31 IC203.7@4060.2,2195.4 IC203.5@4111.39,2195.4 4155.4,2195.4 4185,2225 4225,2225 4243,2207 4243,2068 4222,2047 4137.96,2047 4129.96,2039 4030.92,2039 4020.3,2028.38 4019.86,2028.81 4000.14,2028.81 3996.33,2025 3955,2025 ; IC203.4@4111.39,2370.6 4111.39,2391.39 4145,2425 4145,2472.72 4199.28,2527 4253.33,2527 4260.14,2533.81 4279.86,2533.81 4345,2468.67 v1(4345,2430) ; v1(4160,2005) 4045,2005 4021.19,1981.19 3998.81,1981.19 3955,2025
  other v1: 5136,1376 2804,1435 2843,1438 3945,1440 4681,1448 4885,1505 4641,1536 2821,1637 2776,1638 5270,1675 4365,1705 4567,1709 4113,1860 4990,1880 5070,1880 5150,1880 4068,1905 4970,1915 5010,1915 5050,1915 5090,1915 5130,1915 5165,1915 4227,1930 3780,1952 4372,1952 3642,1986 3607,2074 4881,2088 3440,2095 2860,2130 3146,2165 4970,2170 5000,2170 5030,2170 5060,2170 5090,2170 5120,2170 3999,2175 4154,2192 3107,2197 2868,2212 4990,2215 5020,2215 5050,2215 5080,2215 5110,2215 5140,2215 2923,2220 3440,2235 3590,2240 2791,2263 3967,2269 3172,2285 3109,2286 2886,2294 5180,2300 5210,2300 4732,2316 5195,2325 4185,2385 5030,2410 4722,2432 2774,2437 4115,2445 3599,2482 3516,2493 3688,2496 5070,2500 5120,2500 5170,2500 5220,2500 2765,2506 4431,2515 5095,2520 5145,2520 5195,2520 5245,2520 3033,2529 4742,2551 2995,2560 4583,2581 3901,2610 4376,2614 3730,2638 2993,2650 3506,2651 3036,2652 3809,2709 3913,2739 5218,2782 5173,2783 5249,2811 5197,2812 5177,2857 5239,2858 4469,2902
  other v2: 4837.63,1525.74 5166.37,1525.74
GND_A: "*1 UCC27211D.7" "*1 UCC27211D.9" C30.2 PHASE_A.1 Q3.2 R.2@3311.26,2810
  other v1: 3145,2800 3165,2915 3210,2915 3260,2915 3145,2940 3190,2940 3235,2940 3165,2970 3215,2970 3260,2970
GND_B: "*2 UCC27211D.7" "*2 UCC27211D.9" C25.2 PHASE_B.1 Q2.2 R.2@4176.26,2810
  other v1: 4010,2800 4030,2915 4075,2915 4125,2915 4010,2940 4055,2940 4100,2940 4030,2970 4080,2970 4125,2970
GND_C: "*3 UCC27211D.7" "*3 UCC27211D.9" C21.2 PHASE_C.1 Q1.2 R.2@5041.26,2810
  other v1: 4875,2800 4895,2915 4940,2915 4990,2915 4875,2940 4920,2940 4965,2940 4895,2970 4945,2970 4990,2970
Hall_A: D2.2 ENCODER.4 IC201.52 | length 1918.2
  Top Layer w10: ENCODER.4@2952.4,1541.57 2952.4,1602.4 v1(2955,1605) ; v1(4125,2575) 4125,2565.16 4145.58,2544.58 IC201.52@4145.58,2513.41
  Bottom Layer w10: v1(2955,1605) 3027,1605 3154.37,1732.37 3207.37,1732.37 3227,1752 3269.1,1752 D2.2@3289,1771.9 3289,1782 3303.43,1796.43 3344.43,1796.43 3362,1814 3362,1839.96 3551.23,2029.19 3771.9,2029.19 3795.81,2053.1 3795.81,2343.1 3905.81,2453.1 3905.81,2488.53 3934.28,2517 4056.04,2517 4107,2567.96 ; 4107,2568 4114,2575 v1(4125,2575)
Hall_B: D3.2 ENCODER.3 IC201.53 | length 1998.1
  Top Layer w10: v1(2903,1606) 2903,1610 2903.19,1610.19 ENCODER.3@2903.19,1541.57 ; v1(4090,2590) 4090,2576.12 4125.9,2540.22 IC201.53@4125.9,2513.41
  Bottom Layer w10: v1(2903,1606) 2921,1606 2943.81,1628.81 2964.86,1628.81 2971.67,1622 3018.1,1622 D3.2@3170,1773.9 3162,1781.9 3235.9,1781.9 3247.47,1793.47 3247.47,1806.4 3254.5,1813.43 3329.43,1813.43 3345,1829 3345,1847 3544.19,2046.19 3764.86,2046.19 3778.81,2060.14 3778.81,2350.14 3888.81,2460.14 3888.81,2495.57 3927.24,2534 4049,2534 4090,2575 v1(4090,2590)
Hall_C: D4.2 ENCODER.2 IC201.36 | length 1894.9
  Top Layer w10: v1(2853,1603) 2853,1608.2 2853.9,1609.1 ENCODER.2@2853.9,1541.57 ; v1(4210,2200) 4210.42,2200.42 IC201.36@4281.41,2200.42
  Bottom Layer w10: v1(2853,1603) 2876,1580 2969,1580 2977,1588 3034.04,1588 3161.41,1715.37 3214.41,1715.37 3228.04,1729 3322.13,1729 3330.53,1737.4 3330.53,1759.53 3347.9,1776.9 D4.2@3402,1776.9 3379,1799.9 3379,1832.92 3558.27,2012.19 3778.95,2012.19 3812.81,2046.05 3812.81,2068.81 3820.99,2076.99 4145.67,2076.99 4210,2141.33 v1(4210,2200)
HO_A: "*1 UCC27211D.3" PHASE_A.3
HO_B: "*2 UCC27211D.3" PHASE_B.3
HO_C: "*3 UCC27211D.3" PHASE_C.3
I2C_SCL: 1_I2C.2 IC201.61 IC203.2 R202.2 | length 1840.3
  Top Layer w10: v1(3980,2455) 3980,2455.3 3968.42,2466.88 IC201.61@3968.42,2513.41 3968.42,2573.42 v1(3980,2585)
  Bottom Layer w10: 1_I2C.2@2909,2456.78 2860,2456.78 2860,2455.96 2805,2510.96 2805,2570 2831.02,2596.02 2947.56,2596.02 2962.54,2611 3778.28,2611 3848.1,2680.81 3884.19,2680.81 3897.19,2693.81 3939.86,2693.81 3980,2653.67 v1(3980,2585) ; v1(3980,2455) 3980,2384.02 3990.49,2394.51 4004.51,2394.51 4025,2415 4050,2415 4060.2,2404.8 IC203.2@4060.2,2370.6
I2C_SDA: 1_I2C.3 IC201.62 IC203.1 R203.2 | length 1719.6
  Top Layer w10: v1(3930,2670) 3948.73,2651.27 IC201.62@3948.73,2513.41 3948.73,2457.11 v1(3946.62,2455)
  Bottom Layer w10: 1_I2C.3@2909,2506 2834,2506 2822,2518 2822,2562.96 2838.06,2579.02 2954.6,2579.02 2969.58,2594 3785.33,2594 3855.14,2663.81 3891.23,2663.81 3897.42,2670 v1(3930,2670) ; v1(3946.62,2455) 3946.62,2441.62 3920,2415 3920,2400.51 R203.2@3926,2394.51 3926,2379 3937.98,2367.02 4034.61,2367.02 IC203.1@4034.61,2370.6
LO_A: "*1 UCC27211D.8" PHASE_A.2
  other v1: 3015,2810 3045,2810 3015,2840 3045,2840 3015,2870 3045,2870
LO_B: "*2 UCC27211D.8" PHASE_B.2
  other v1: 3880,2810 3910,2810 3880,2840 3910,2840 3880,2870 3910,2870
LO_C: "*3 UCC27211D.8" PHASE_C.2
  other v1: 4745,2810 4775,2810 4745,2840 4775,2840 4745,2870 4775,2870